# EAGLE board Jumper%20Board.brd (EAGLE 7.2.0)
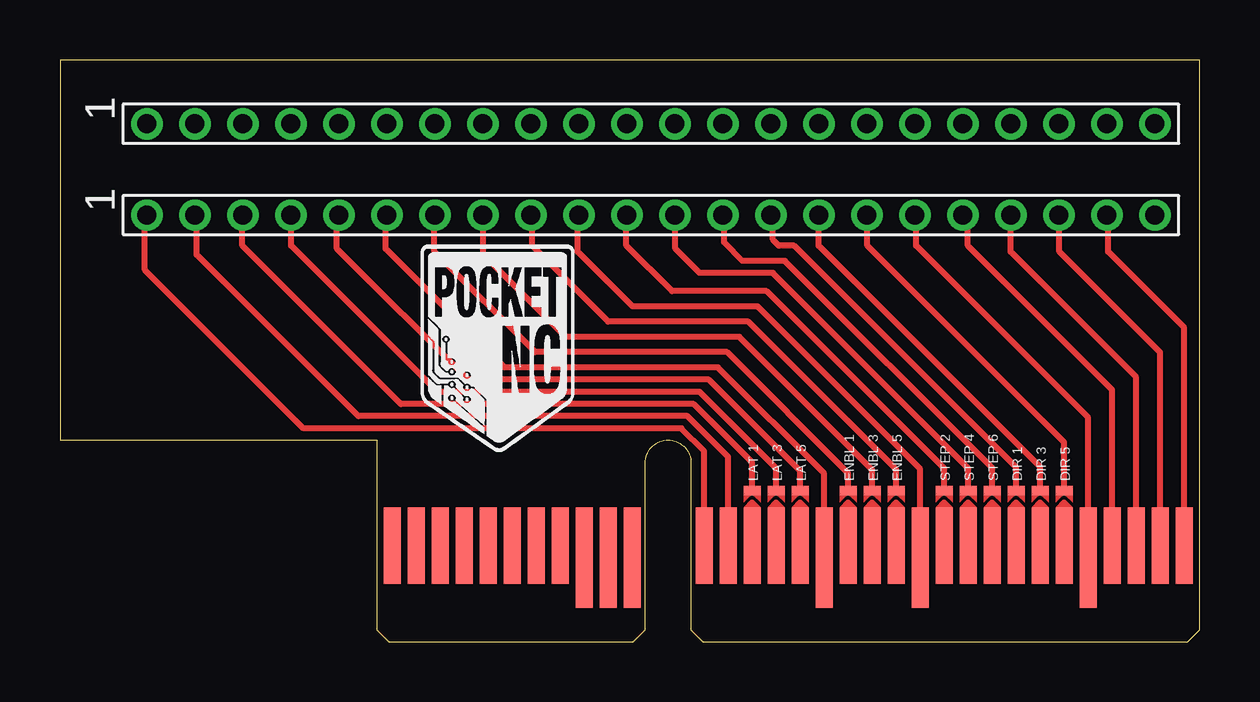
[diagram p0: board, top side]
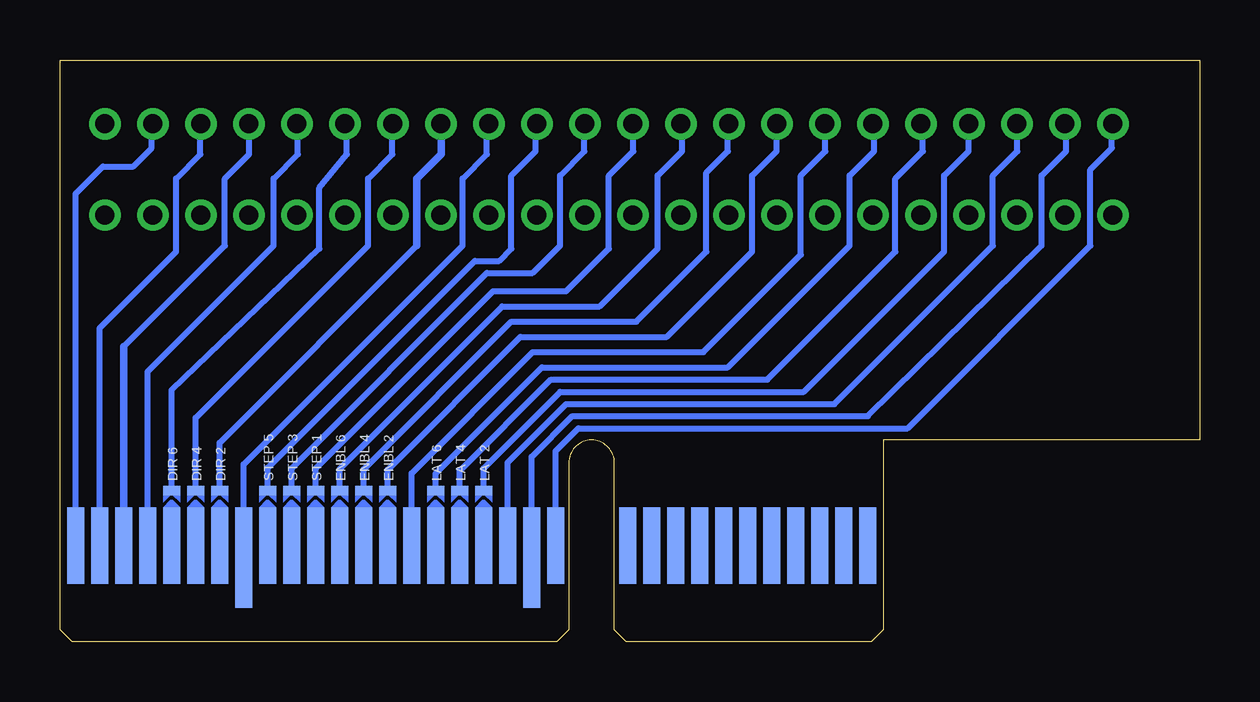
[diagram p1: board, bottom side, seen from below]

Size 47.49 x 24.25 mm. Coordinates in mm from the lower left corner, seen from the top.
Outline: 47.49,8.4 47.49,24.25 0,24.25 0,8.4 13.19,8.4
Copper layers (1*16): Top 0.035mm / dielectric 1.5mm / Bottom 0.035mm
Design rules "default": minimum track width 10mil, minimum drill 24mil, track to track 8mil, track to pad 8mil, pad to pad 8mil, via to via 8mil, smd to smd 8mil, copper to edge 40mil, drill to drill 8mil, minimum pad ring 10mil, minimum via ring 8mil, stop-mask expansion 4mil, vias tented up to drill 0mil, thermal gap 10mil

## Footprints (pad centres in the part's own frame; a part is rotated, then mirrored left to right if it is on the bottom)
PCIE_64_SMART_BOARD = smd 0.7 x 4.2: GND@1 8.65,3.5; GND@2 9.65,3.5; GND@3 10.65,3.5; P$49 18.65,3.5; P$53 22.65,3.5; P$60 29.65,3.5 | smd 0.7 x 3.2 bottom: P$1 0.65,4; P$2 1.65,4; P$3 2.65,4; P$4 3.65,4; P$5 4.65,4; P$6 5.65,4; P$7 6.65,4; P$8 7.65,4; P$9 8.65,4; P$10 9.65,4; P$11 10.65,4; P$12 13.65,4; P$14 15.65,4; P$15 16.65,4; P$16 17.65,4; P$17 18.65,4; P$18 19.65,4; P$19 20.65,4; P$20 21.65,4; P$21 22.65,4; P$22 23.65,4; P$23 24.65,4; P$24 25.65,4; P$26 27.65,4; P$27 28.65,4; P$28 29.65,4; P$29 30.65,4; P$30 31.65,4; P$31 32.65,4; P$32 33.65,4 | smd 0.7 x 4.2 bottom: P$13 14.65,3.5; P$25 26.65,3.5 | smd 0.7 x 0.4 bottom: P$15@1 16.65,6.3; P$16@1 17.65,6.3; P$17@1 18.65,6.3; P$19@1 20.65,6.3; P$20@1 21.65,6.3; P$21@1 22.65,6.3; P$22@1 23.65,6.3; P$23@1 24.65,6.3; P$24@1 25.65,6.3; P$26@1 27.65,6.3; P$27@1 28.65,6.3; P$28@1 29.65,6.3 | smd 0.7 x 3.2: P$33 0.65,4; P$34 1.65,4; P$35 2.65,4; P$36 3.65,4; P$37 4.65,4; P$38 5.65,4; P$39 6.65,4; P$40 7.65,4; P$44 13.65,4; P$45 14.65,4; P$46 15.65,4; P$47 16.65,4; P$48 17.65,4; P$50 19.65,4; P$51 20.65,4; P$52 21.65,4; P$54 23.65,4; P$55 24.65,4; P$56 25.65,4; P$57 26.65,4; P$58 27.65,4; P$59 28.65,4; P$61 30.65,4; P$62 31.65,4; P$63 32.65,4; P$64 33.65,4 | smd 0.7 x 0.4: P$46@1 15.65,6.3; P$47@1 16.65,6.3; P$48@1 17.65,6.3; P$50@1 19.65,6.3; P$51@1 20.65,6.3; P$52@1 21.65,6.3; P$54@1 23.65,6.3; P$55@1 24.65,6.3; P$56@1 25.65,6.3; P$57@1 26.65,6.3; P$58@1 27.65,6.3; P$59@1 28.65,6.3
1X22 = drill 0.8: 1 -21,0; 2 -19,0; 3 -17,0; 4 -15,0; 5 -13,0; 6 -11,0; 7 -9,0; 8 -7,0; 9 -5,0; 10 -3,0; 11 -1,0; 12 1,0; 13 3,0; 14 5,0; 15 7,0; 16 9,0; 17 11,0; 18 13,0; 19 15,0; 20 17,0; 21 19,0; 22 21,0

## Placement (x,y rotation side)
U$1  [PCIE_64_SMART_BOARD]  13.19,0 0 top
U$2  1X22THM  [1X22]  24.62,21.59 0 top
U$3  1X22THM  [1X22]  24.62,17.78 0 top

## Library data of the parts
U$1 = PocketNC
U$2 U$3 = adafruit

## Nets
N$1: U$1.P$44 U$3.1
N$2: U$1.P$45 U$3.2
N$3: U$1.P$46@1 U$3.3
N$4: U$1.P$47@1 U$3.4
N$5: U$1.P$48@1 U$3.5
N$6: U$1.P$49 U$3.6
N$7: U$1.P$50@1 U$3.7
N$8: U$1.P$51@1 U$3.8
N$9: U$1.P$52@1 U$3.9
N$10: U$1.P$53 U$3.10
N$11: U$1.P$54@1 U$3.11
N$12: U$1.P$55@1 U$3.12
N$13: U$1.P$56@1 U$3.13
N$14: U$1.P$57@1 U$3.14
N$15: U$1.P$58@1 U$3.15
N$16: U$1.P$59@1 U$3.16
N$17: U$1.P$60 U$3.17
N$18: U$1.P$61 U$3.18
N$19: U$1.P$62 U$3.19
N$20: U$1.P$63 U$3.20
N$21: U$1.P$64 U$3.21
N$22: U$1.P$12 U$2.1
N$23: U$1.P$13 U$2.2
N$24: U$1.P$14 U$2.3
N$25: U$1.P$15@1 U$2.4
N$26: U$1.P$16@1 U$2.5
N$27: U$1.P$17@1 U$2.6
N$28: U$1.P$18 U$2.7
N$29: U$1.P$19@1 U$2.8
N$30: U$1.P$20@1 U$2.9
N$31: U$1.P$21@1 U$2.10
N$32: U$1.P$22@1 U$2.11
N$33: U$1.P$23@1 U$2.12
N$34: U$1.P$24@1 U$2.13
N$35: U$1.P$25 U$2.14
N$36: U$1.P$26@1 U$2.15
N$37: U$1.P$27@1 U$2.16
N$38: U$1.P$28@1 U$2.17
N$39: U$1.P$29 U$2.18
N$40: U$1.P$30 U$2.19
N$41: U$1.P$31 U$2.20
N$42: U$1.P$32 U$2.21

## Tracks (layer width: path | path; a pad name or v marks a point on that pad's centre or on a via)
N$1
  Top 0.254: U$1.P$44 26.84,7.94 25.89,8.89 10.14,8.89 3.54,15.49 3.54,17.7 U$3.1
N$2
  Top 0.254: U$1.P$45 27.84,7.7 26.14,9.4 12.43,9.4 5.7,16.13 5.7,17.7 U$3.2
N$3
  Top 0.254: U$1.P$46@1 28.84,7.46 26.4,9.91 14.21,9.91 7.6,16.51 7.6,17.76 U$3.3
N$4
  Top 0.254: U$1.P$47@1 29.84,7.23 26.65,10.41 15.73,10.41 9.63,16.51 9.63,17.77 U$3.4
N$5
  Top 0.254: U$1.P$48@1 30.84,7.12 27.03,10.92 17,10.92 11.54,16.38 11.54,17.7 U$3.5
N$6
  Top 0.254: U$1.P$49 31.84,7 27.41,11.43 18.52,11.43 13.57,16.38 13.57,17.73 U$3.6
N$7
  Top 0.254: U$1.P$50@1 32.84,7.02 27.8,12.06 19.79,12.06 15.6,16.26 15.6,17.76 U$3.7
N$8
  Top 0.254: U$1.P$51@1 33.84,7.16 28.3,12.7 21.06,12.7 17.64,16.13 17.64,17.77 U$3.8
N$9
  Top 0.254: U$1.P$52@1 34.84,7.18 28.68,13.33 22.84,13.33 19.67,16.51 19.67,17.73 U$3.9
N$10
  Top 0.254: U$1.P$53 35.84,7.2 29.07,13.97 23.86,13.97 21.57,16.26 21.57,17.73 U$3.10
N$11
  Top 0.254: U$1.P$54@1 36.84,7.21 29.45,14.6 25.51,14.6 23.6,16.51 23.6,17.76 U$3.11
N$12
  Top 0.254: U$1.P$55@1 37.84,7.23 29.7,15.37 26.65,15.37 25.64,16.38 25.64,17.76 U$3.12
N$13
  Top 0.254: U$1.P$56@1 38.84,7.24 30.21,15.88 28.43,15.88 27.67,16.64 27.67,17.73 U$3.13
N$14
  Top 0.254: U$1.P$57@1 39.84,7.26 30.59,16.51 29.95,16.51 29.7,16.76 29.7,17.7
  Top 0.305: 29.7,17.7 U$3.14
N$15
  Top 0.254: U$1.P$58@1 40.84,7.27 31.61,16.51 31.61,17.77
  Top 0.305: 31.61,17.77 U$3.15
N$16
  Top 0.254: U$1.P$59@1 41.84,8.31 33.64,16.51 33.64,17.76
  Top 0.305: 33.64,17.76 U$3.16
N$17
  Top 0.254: U$1.P$60 42.84,9.34 35.67,16.51 35.67,17.73
  Top 0.305: 35.67,17.73 U$3.17
N$18
  Top 0.254: U$1.P$61 43.84,10.5 37.83,16.51 37.83,17.57 U$3.18
N$19
  Top 0.254: U$1.P$62 44.84,11.02 39.61,16.26 39.61,17.77 U$3.19
N$20
  Top 0.254: U$1.P$63 45.84,12.05 41.64,16.26 41.64,17.76 U$3.20
N$21
  Top 0.254: U$1.P$64 46.84,13.09 43.67,16.26 43.67,17.73 U$3.21
N$22
  Bottom 0.254: U$1.P$12 26.84,7.94 25.89,8.89 12.17,8.89 4.55,16.51 4.55,19.68 3.67,20.57 3.67,21.54 U$2.1
N$23
  Bottom 0.254: U$1.P$13 27.84,7.7 26.14,9.4 13.83,9.4 6.59,16.51 6.59,19.43 5.57,20.45 5.57,21.54 U$2.2
N$24
  Bottom 0.254: U$1.P$14 28.84,7.46 26.4,9.91 15.22,9.91 8.62,16.51 8.62,19.43 7.6,20.45 7.6,21.57 U$2.3
N$25
  Bottom 0.254: U$1.P$15@1 29.84,7.23 26.65,10.41 16.49,10.41 10.65,16.26 10.65,19.43 9.63,20.45 9.63,21.58 U$2.4
N$26
  Bottom 0.254: U$1.P$16@1 30.84,7.12 27.03,10.92 18.02,10.92 12.68,16.26 12.68,19.3 11.54,20.45 11.54,21.51 U$2.5
N$27
  Bottom 0.254: U$1.P$17@1 31.84,7 27.41,11.43 19.67,11.43 14.59,16.51 14.59,19.43 13.57,20.45 13.57,21.54 U$2.6
N$28
  Bottom 0.254: U$1.P$18 32.84,7.02 27.8,12.06 20.68,12.06 16.62,16.13 16.62,19.43 15.6,20.45 15.6,21.57 U$2.7
N$29
  Bottom 0.254: U$1.P$19@1 33.84,7.16 28.3,12.7 22.21,12.7 18.65,16.26 18.65,19.43 17.64,20.45 17.64,21.57 U$2.8
N$30
  Bottom 0.254: U$1.P$20@1 34.84,7.18 28.68,13.33 23.48,13.33 20.56,16.26 20.56,19.56 19.67,20.45 19.67,21.54 U$2.9
N$31
  Bottom 0.254: U$1.P$21@1 35.84,7.2 29.07,13.97 25,13.97 22.59,16.38 22.59,19.43 21.57,20.45 21.57,21.54 U$2.10
N$32
  Bottom 0.254: U$1.P$22@1 36.84,7.21 29.45,14.6 26.4,14.6 24.62,16.38 24.62,19.43 23.6,20.45 23.6,21.57 U$2.11
N$33
  Bottom 0.254: U$1.P$23@1 37.84,7.23 29.7,15.37 27.8,15.37 26.65,16.51 26.65,19.43 25.64,20.45 25.64,21.57 U$2.12
N$34
  Bottom 0.254: U$1.P$24@1 38.84,7.24 30.21,15.88 29.19,15.88 28.68,16.38 28.68,19.43 27.67,20.45 27.67,21.54 U$2.13
N$35
  Bottom 0.254: U$1.P$25 39.84,7.39 30.72,16.51 30.72,19.3 29.7,20.32 29.7,21.51 U$2.14
N$36
  Bottom 0.254: 32.62,16.51 40.84,8.29 U$1.P$26@1
  Bottom 0.305: 32.62,16.51 32.62,19.3 31.61,20.32 31.61,21.57 U$2.15
N$37
  Bottom 0.254: 41.84,9.32 U$1.P$27@1 41.84,9.32 | 41.84,9.32 34.65,16.51 34.65,19.3 33.64,20.32 33.64,21.57
  Bottom 0.305: 33.64,21.57 U$2.16
N$38
  Bottom 0.254: 42.84,10.48 U$1.P$28@1 42.84,10.48 | 42.84,10.48 36.69,16.38 36.69,18.92 35.54,20.32 35.54,21.51 U$2.17
N$39
  Bottom 0.254: U$1.P$29 43.84,11.26 38.59,16.51 38.59,19.3 37.57,20.32 37.57,21.54
  Bottom 0.305: 37.57,21.54 U$2.18
N$40
  Bottom 0.254: 44.84,12.29 40.62,16.51 40.62,19.3 39.61,20.32 39.61,21.58
  Bottom 0.305: U$1.P$30 44.84,12.29 | 39.61,21.58 U$2.19
N$41
  Bottom 0.254: U$1.P$31 45.84,13.07 42.65,16.26 42.65,19.3 41.64,20.32 41.64,21.57
  Bottom 0.305: 41.64,21.57 U$2.20
N$42
  Bottom 0.254: U$1.P$32 46.84,18.67 45.7,19.81 44.43,19.81 43.67,20.57 43.67,21.54 U$2.21